# Altium PCB TIDA-01485.PcbDoc (part 1 of 2)
Units mil, origin at the board's own origin, x right, y up, seen from the top; angles counter-clockwise.
Board outline 1417.32 x 1968.5 mil, 4 copper layers (Top Layer, GND, PWR, Bottom Layer), stack 79.834 mil thick; 108 components, 78 nets, 395 pads, 443 vias.
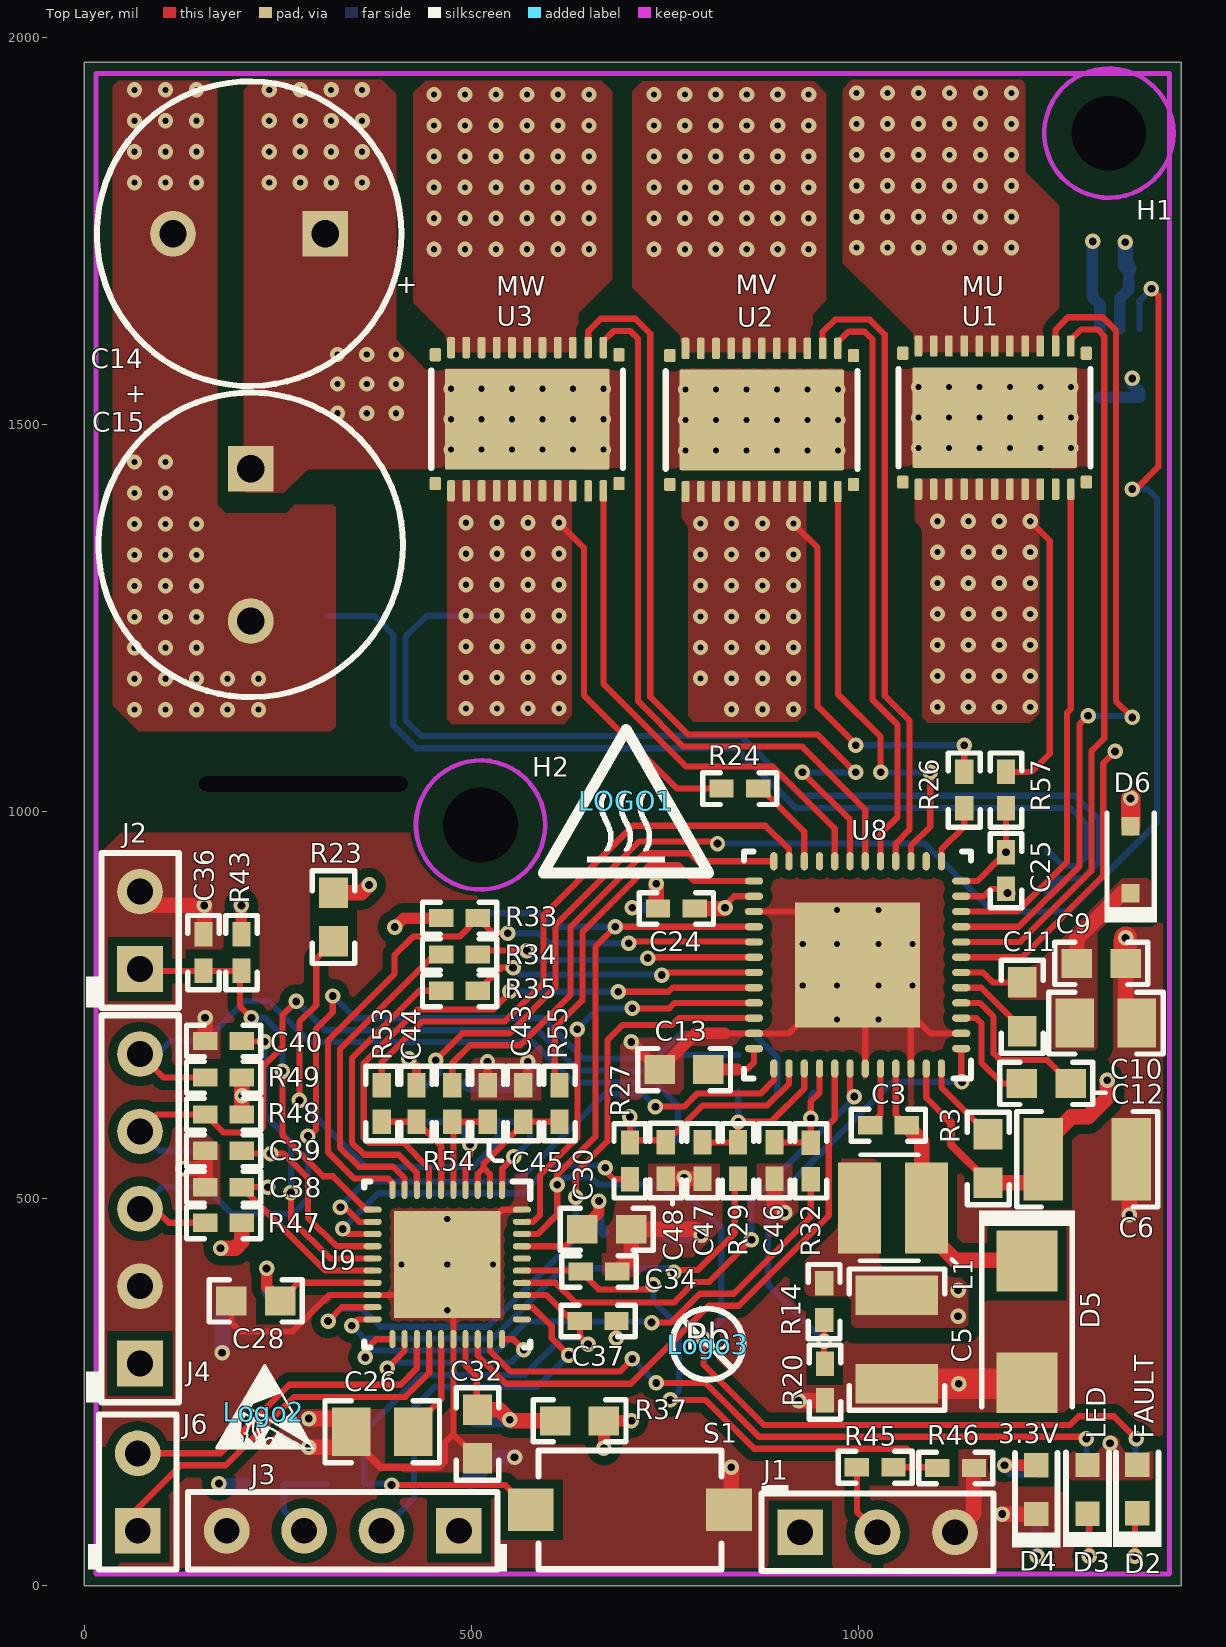
[diagram p0: Top Layer view]
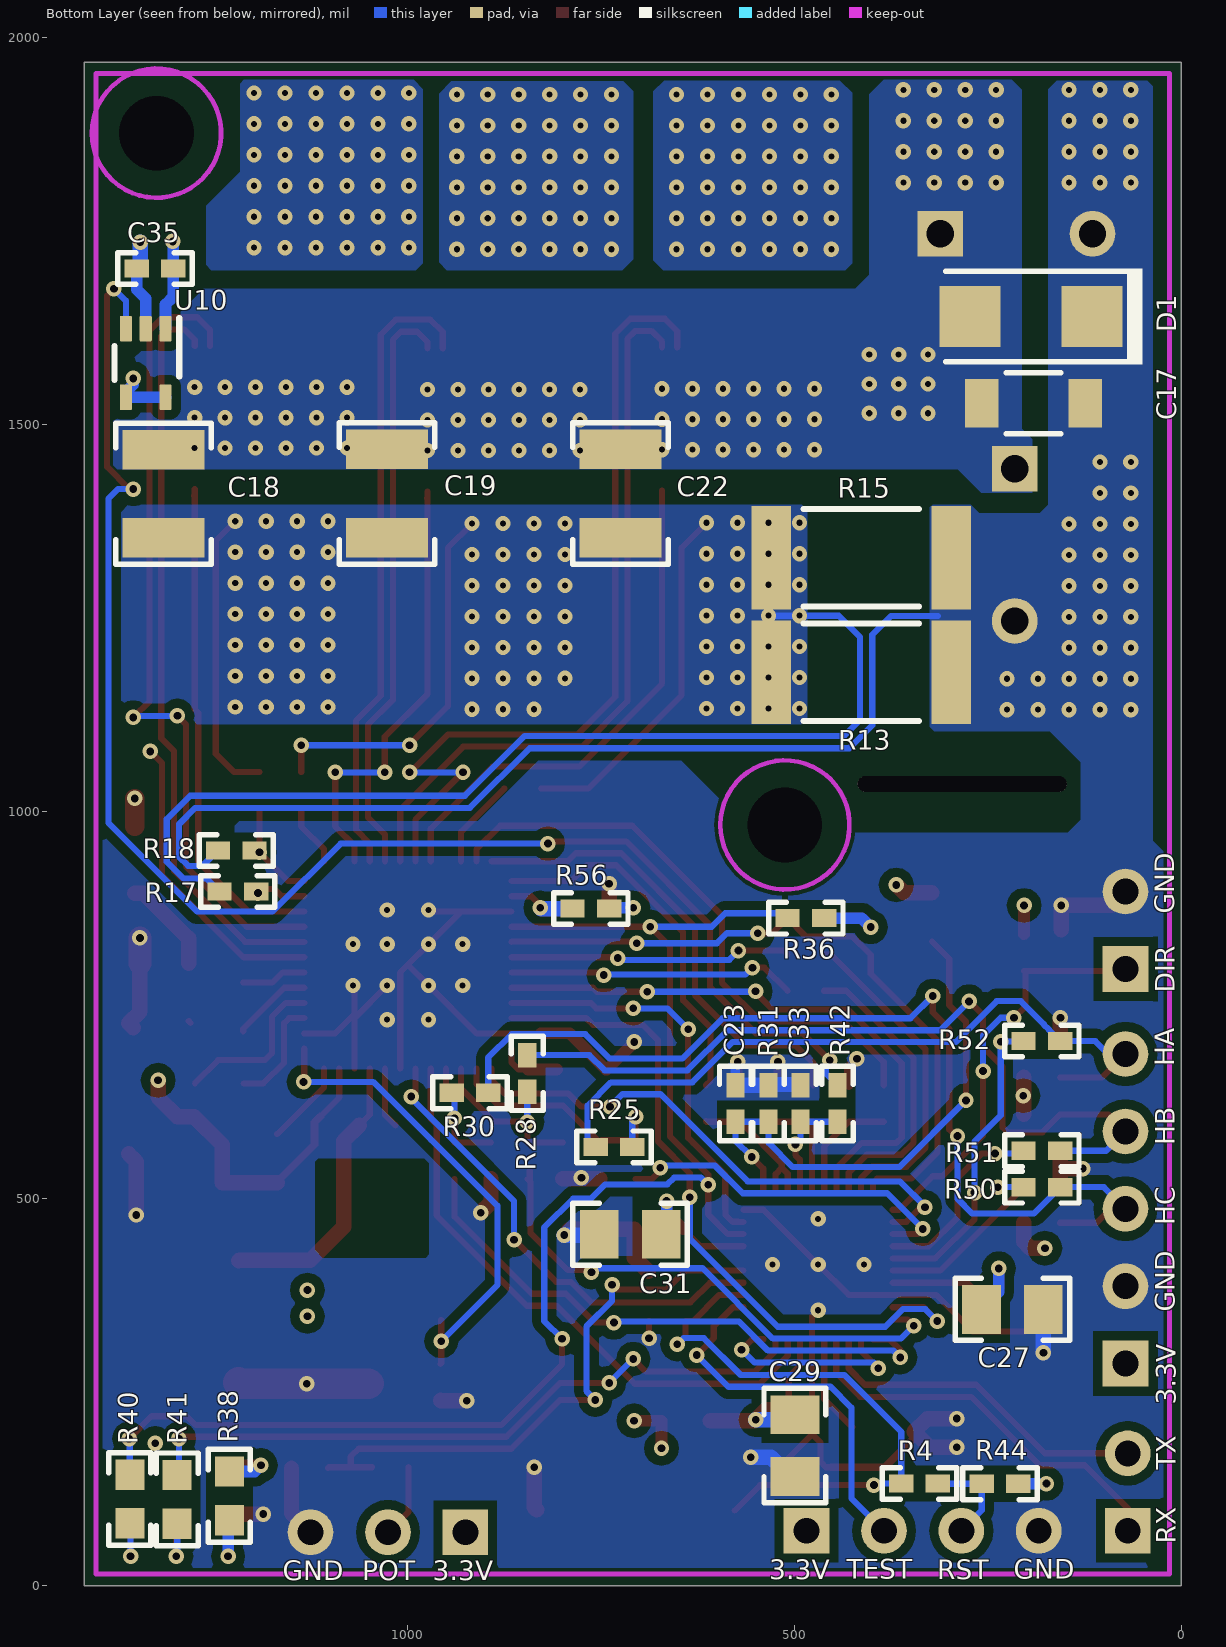
[diagram p1: Bottom Layer view, seen from below]
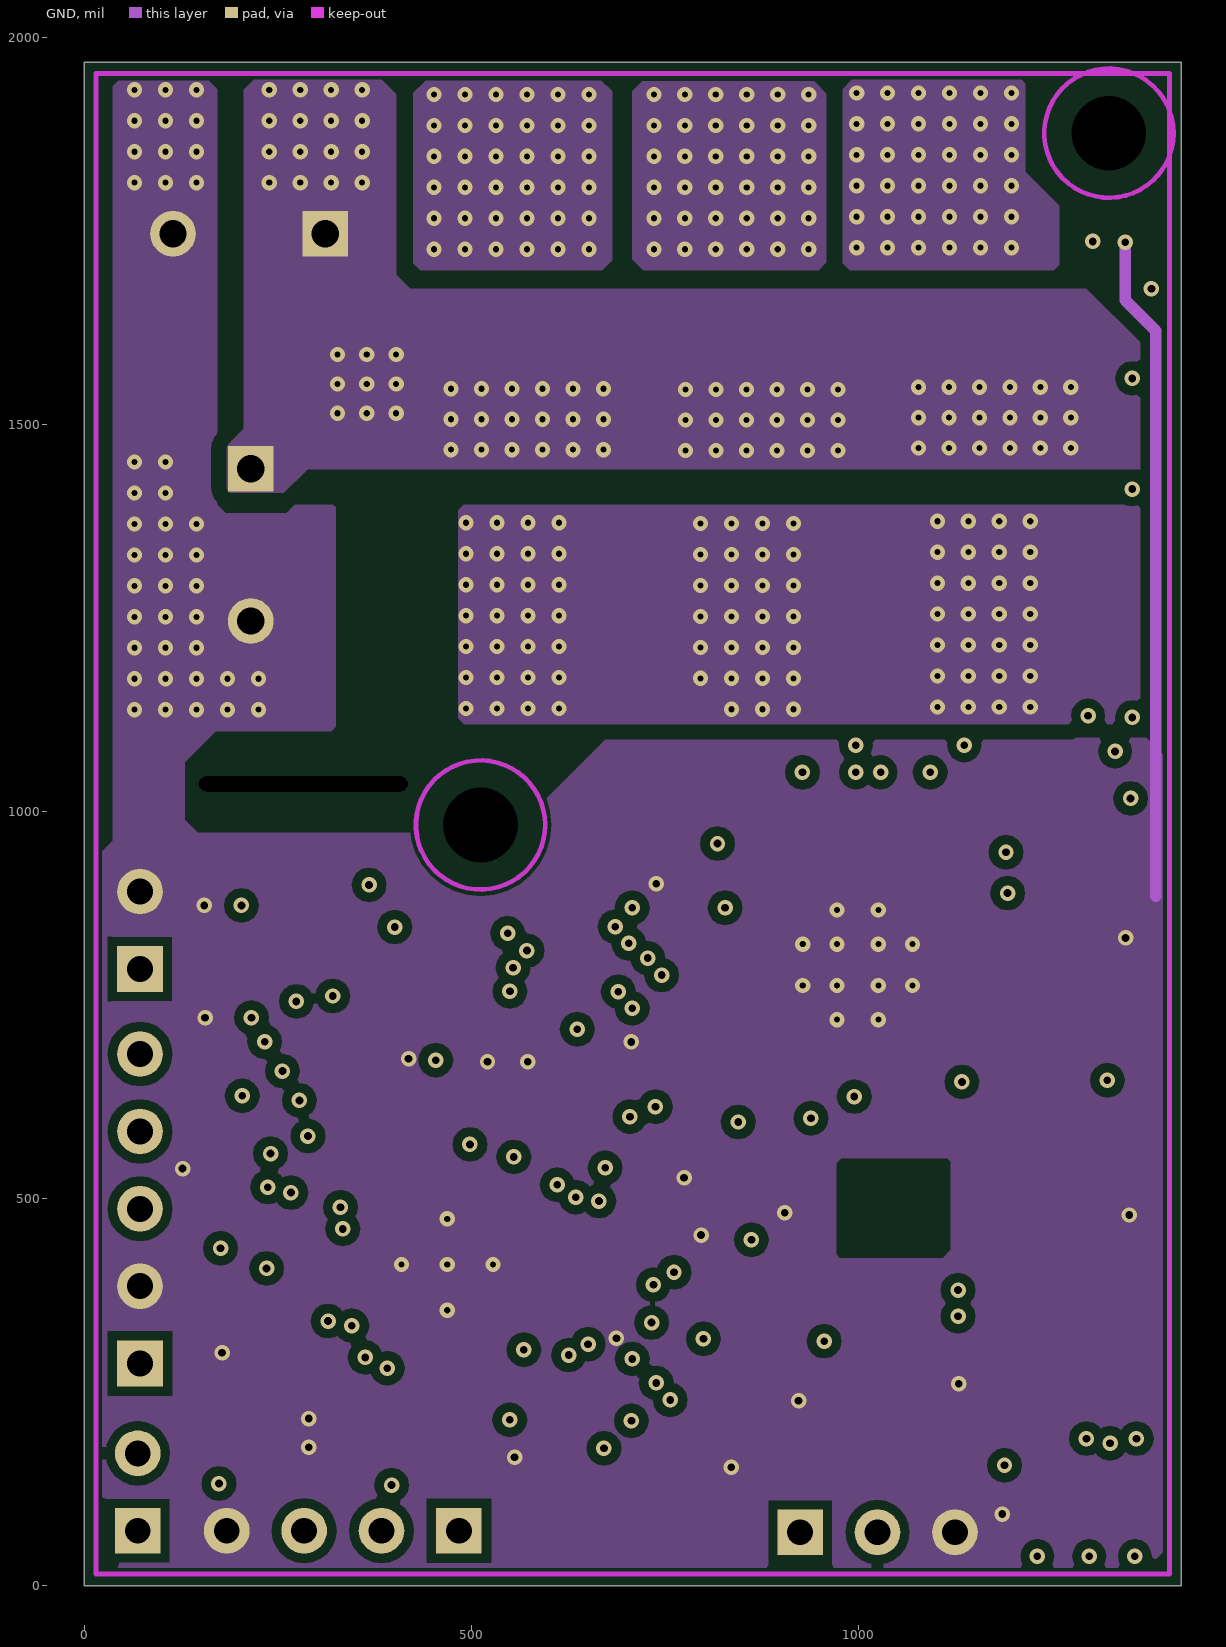
[diagram p2: GND]
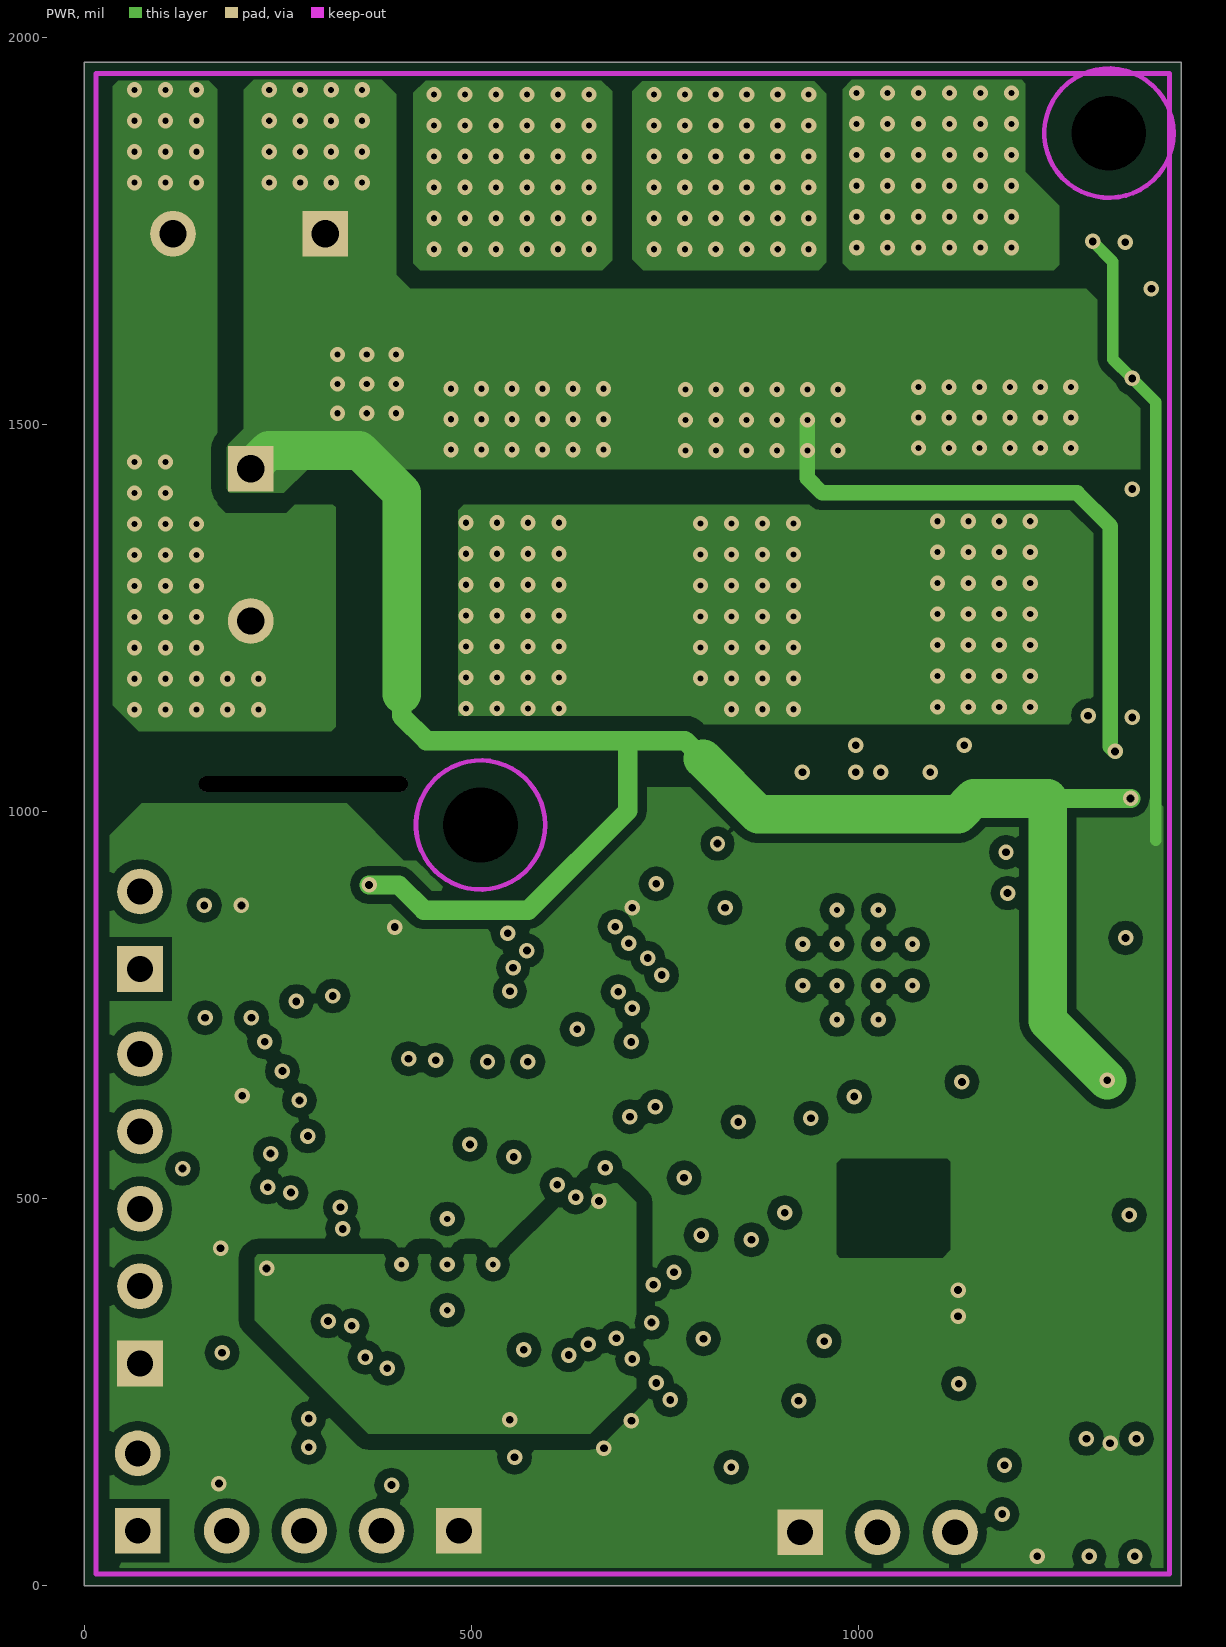
[diagram p3: PWR]

## Layer stack, top to bottom
Top Solder: solder mask 0.4, Solder Resist, Dk 3.5
Top Layer: signal copper 1.4
Dielectric1: core 59.2, FR-4, Dk 4.8
GND: signal copper 1.417
Dielectric 3: prepreg 5, Dk 4.2
PWR: signal copper 1.417
Dielectric 2: core 10, Dk 4.2
Bottom Layer: signal copper 1.4
Bottom Solder: solder mask 0.4, Solder Resist, Dk 3.5

## Board outline
0,0 1417.32,0 1417.32,1968.5 0,1968.5

## Design rules (kind name [scope] priority, off if disabled: settings)
AcuteAngle [All] p1: minimum=4.50000000000000E+0001 checktracksonly=FALSE
AssemblyTestPointUsage [All] p1: valid=2
Clearance Clearance_u1 [InPadClass('U1')] p1: gap=7.7
Clearance Clearance_Boardedge_poly [OnCopper and InPolygon vs IsKeepOut] p2: gap=5
Clearance Clearance_MTG_COPPER [InPadClass('MTG') vs InPolygon] p3: gap=40
Clearance "Shape to Shape" [InPolygon vs InPolygon] p4: gap=20
Clearance "shape to all" [InPolygon] p5: gap=12
Clearance "Clearance_via_thr pin" [IsVia vs IsThruPin] p6: gap=8
Clearance [All] p7: gap=7
DiffPairsRouting DiffPair_DiffPairsRouting [InDifferentialPair ('kan')] p1: maxlimit=10 minlimit=10 mostfreqgap=10 toplayer_minwidth=15 toplayer_maxwidth=15 toplayer_prefwidth=15 midlayer1_minwidth=15 midlayer1_maxwidth=15 midlayer1_prefwidth=15 midlayer2_minwidth=15 midlayer2_maxwidth=15 midlayer2_prefwidth=15 bottomlayer_minwidth=15 bottomlayer_maxwidth=15 bottomlayer_prefwidth=15 maxuncoupledlength=500
DiffPairsRouting DiffPair_DiffPairsRouting_1 [InDifferentialPair ('kan')] p2: maxlimit=10 minlimit=10 mostfreqgap=10 toplayer_minwidth=15 toplayer_maxwidth=15 toplayer_prefwidth=15 midlayer1_minwidth=15 midlayer1_maxwidth=15 midlayer1_prefwidth=15 midlayer2_minwidth=15 midlayer2_maxwidth=15 midlayer2_prefwidth=15 bottomlayer_minwidth=15 bottomlayer_maxwidth=15 bottomlayer_prefwidth=15 maxuncoupledlength=500
DiffPairsRouting [All] p3: maxlimit=100 minlimit=10 mostfreqgap=10 toplayer_minwidth=15 toplayer_maxwidth=15 toplayer_prefwidth=15 midlayer1_minwidth=15 midlayer1_maxwidth=15 midlayer1_prefwidth=15 midlayer2_minwidth=15 midlayer2_maxwidth=15 midlayer2_prefwidth=15 bottomlayer_minwidth=15 bottomlayer_maxwidth=15 bottomlayer_prefwidth=15 maxuncoupledlength=1000
FabricationTestPointUsage TestPointUsage [All] p1: valid=2 allowmultiple=FALSE
FabricationTestpoint Testpoint [All] p1: side=3 testpointundercomponent=TRUE minsize=40 maxsize=100 preferedsize=60 minholesize=0 maxholesize=40 preferedholesize=32 testpointgrid=1 allowsidetop=TRUE allowsidebottom=TRUE usegrid=TRUE gridtolerance=0.01
FanoutControl Fanout_LCC [IsLCC] p1: bgadir=Out bgaviamode=Centered fanoutstyle=Auto fanoutdirection=Alternating viagrid=1 // Fanout_LCC (Default Rule)
FanoutControl Fanout_BGA [IsBGA] p2: bgadir=Out bgaviamode=Centered fanoutstyle=Auto fanoutdirection=Alternating viagrid=1 // Fanout_BGA (Default Rule)
FanoutControl Fanout_Default [All] p4: bgadir=Out bgaviamode=Centered fanoutstyle=Auto fanoutdirection=Alternating viagrid=1 // Fanout_Default (Default Rule)
FanoutControl Fanout_Small [(CompPinCount < 5)] p5: bgadir=Out bgaviamode=Centered fanoutstyle=Auto fanoutdirection=OutThenIn viagrid=1 // Fanout_Small (Default Rule)
HoleSize [All] p1: absolutevalues=TRUE maxlimit=1000 minlimit=7 maxpercent=80.000 minpercent=20.000
MatchedLengths DiffPair_MatchedLengths [InDifferentialPair ('kan')] p1: tolerance=1000 checknetsindiffpair=TRUE checkdiffpairvsdiffpair=FALSE checkxsignals=FALSE checkothers=FALSE
MatchedLengths DiffPair_MatchedLengths_1 [InDifferentialPair ('kan')] p2: tolerance=1000 checknetsindiffpair=TRUE checkdiffpairvsdiffpair=FALSE checkxsignals=FALSE checkothers=FALSE
MinimumAnnularRing [All] p1: minimumring=5
MinimumAnnularRing MinimumAnnularRing_ThermalPadVias [IsVia and InAnyComponent] p2: minimumring=5.91
MinimumSolderMaskSliver MinimumSolderMaskSliver_Logo [InComponentClass('Logo') vs InComponentClass('Logo')] p1: minsoldermaskwidth=0.7
MinimumSolderMaskSliver [All] p2: minsoldermaskwidth=3.94
PlaneClearance [All] p1: clearance=15
PolygonConnect [All] p1: connectstyle=Direct reliefconductorwidth=10 reliefentries=4 polygonreliefangle="90 Angle" airgapwidth=10
RoutingVias RoutingVias_power [InNetClass('POWER')] p1: holewidth=16 width=32 viastyle="Through Hole" minholewidth=7.87 minwidth=19.68 maxholewidth=16 maxwidth=32
RoutingVias ThermalPadVias [IsVia and InAnyComponent] p2: holewidth=8 width=20 viastyle="Through Hole" minholewidth=7.87 minwidth=19 maxholewidth=12 maxwidth=24
RoutingVias [All] p3: holewidth=10 width=20 viastyle="Through Hole" minholewidth=7.87 minwidth=19.68 maxholewidth=16 maxwidth=32
SMDToCorner [All] p1: distance=30000
SilkToSilkClearance [All] p1: silktosilkclearance=5
SilkToSolderMaskClearance SilkscreenOverComponentPads [IsPad] p1: minsilkscreentomaskgap=0 clearancetoexposedcopper=TRUE
SolderMaskExpansion [All] p1: expansion=3
Width Width_power [InNetClass('pwr')] p1: maxlimit=200 minlimit=10 preferedwidth=20
Width [All] p2: maxlimit=100 minlimit=6 preferedwidth=8 checkconnectedcopper=TRUE
17 further rules are at their usual default settings.

## Classes and differential pairs
component class TIDA-01485_Page2: C26 C27 C28 C29 C30 C31 C32 C33 C34 C35 C36 C37 C38 C39 C40 C? D2 D3 D4 J1 J2 J3 J4 J6 R4 R37 R38 R40 R41 R42 R43 R44 R45 R46 R47 R48 R49 R50 R51 R52 R? S1 U9 U10
component class TIDA-01485_Page1: C3 C5 C6 C9 C10 C11 C12 C13 C14 C15 C17 C23 C24 C25 C43 C44 C45 C46 C47 C48 D1 D5 D6 L1 R3 R14 R20 R23 R24 R25 R26 R27 R28 R29 R30 R31 R32 R33 R34 R35 R36 R53 R54 R55 R56 R57 U8
component class AssemblyNote: ZZ1 ZZ2 ZZ3 ZZ4
component class TIDA-01485_Hardware: H1 H2 LOGO1 Logo2 Logo3 U? ZZ1 ZZ2 ZZ3 ZZ4
pad class U1: U9-39 U9-40 U9-41
component class TIDA-01485_Page3: C18 C19 C22 R13 R15 R17 R18 R? U1 U2 U3
component class Header: J1 J2 J4 J6

## Components (designator, comment, footprint, x,y, rotation, side; value= is the part's Value field where it differs from the comment)
C3 "GRM155R71E103KA01D" 0402 1039,595 r0 top
C5 "TMK325B7226KMHT" 1210_270 1050,318 r270 top
C6 "GRM32ER72A225KA35L" 1210 1296,551 r0 top
C9 "06035C104KAT2A" 0603 1314,804 r0 top
C10 "C2012X7R1V475K125AC" 0805_HV 1320,727 r180 top
C11 "C1608X7R1C105K" 0603 1212,748 r270 top
C12 "C0603C223K3RACTU" 0603 1243,649 r0 top
C13 "C1608X7R1C105K" 0603 775,667 r180 top
C14 "35ZLG470MEFC10X20" CAPPR5-10X20 213,1747 r180 top
C15 "35ZLG470MEFC10X20" CAPPR5-10X20 215,1345 r270 top
C17 "C3216X7R2A104K160AA" 1206_180 191,1528 r180 bottom
C18 "GRM32ER72A225KA35L" 1210 1315,1411 r270 bottom
C19 "GRM32ER72A225KA35L" 1210 1026.32,1411.33 r270 bottom
C22 "GRM32ER72A225KA35L" 1210_270 724.32,1411.33 r270 bottom
C23 "885012105016" 0402 576,623 r90 bottom
C24 "885012105016" 0402 765,875 r180 top
C25 "885012205061" 0402 1191,924 r90 top
C26 "C0805C474K4RACTU" 0805_HV 385,199 r180 top
C27 "0805YD106MAT2A" 0805_HV 218,357 r180 bottom
C28 "0603YC104JAT2A" 0603 221.5,368 r180 top
C29 "0805YD106MAT2A" 0805_HV 499,181 r270 bottom
C30 "0603YC104JAT2A" 0603 675,460.57 r0 top
C31 "0805YD106MAT2A" 0805_HV 712,454 r0 bottom
C32 "0603YC104JAT2A" 0603 508,196 r270 top
C33 "885012105016" 0402 492,623 r90 bottom
C34 "885012105016" 0402 665,406 r0 top
C35 "885012105016" 0402 1326,1702 r0 bottom
C36 "885012105016" 0402 154,818 r90 top
C37 "GRM155R71H222KA01D" 0402 664,342 r0 top
C38 "885012205061" 0402 180,515 r180 top
C39 "885012205061" 0402 180,562 r180 top
C40 "885012205061" 0402 180,703.81 r180 top
C43 "CGA2B2X7R1H332K050BA" 0402 567.35,623 r90 top
C44 "CGA2B2X7R1H332K050BA" 0402 429.35,623 r90 top
C45 "CGA2B2X7R1H332K050BA" 0402 521.35,623 r90 top
C46 "885012205061" 0402 891.81,549.22 r270 top
C47 "885012205061" 0402 798.81,549.22 r270 top
C48 "885012205061" 0402 751.37,549.44 r270 top
D1 "SMAJ58CA" SMA 194,1640 r0 bottom
D2 "150060GS75000" WL-SMCW_GREEN 1360.54,125 r90 top
D3 "150060GS75000" WL-SMCW_GREEN 1296.3,124.5 r90 top
D4 "150060GS75000" WL-SMCW_GREEN 1229.98,124.06 r90 top
D5 "ES2DA-13-F" SMA 1218,341 r270 top
D6 "PMEG6010CEJ,115" SOD-323F 1352,938 r90 top
H1 "NY PMS 256 0025 PH" "NY PMS 256 0025 PH" 1324,1877 r180 top locked
H2 "NY PMS 256 0025 PH" "NY PMS 256 0025 PH" 512,983 r180 top locked
J1 "800-10-003-10-001000" Mill-Max_800-10-003-10-001000 1025,69 r0 top
J2 "800-10-002-10-001000" Mill-Max_800-10-002-10-001000 72,846.91 r90 top
J3 "HEADER_1X4" Mill-Max_800-10-004-10-001000 334,71 r180 top
J4 "800-10-005-10-001000" Mill-Max_800-10-005-10-001000 72,487 r90 top
J6 "800-10-002-10-001000" Mill-Max_800-10-002-10-001000 69,121 r90 top
L1 "SDR0302-121KL" SDR0302 1045,488 r180 top
LOGO1 "CAUTION HOT SURFACE" IEC_HotSurface_small 700,1014 r0 top
Logo2 "ESD Susceptible" ESD_Overlay_small 232,225 r0 top
Logo3 "Pb-Free Symbol" Pb-Free_Overlay_small 805.72,312.01 r0 top
R3 "CRCW06033R30JNEA" 0603 1168,552 r270 top
R4 "ERJ-2RKF1000X" 0402 338,132 r180 bottom
R13 "CSNL2512FT2L00" 2512 413.32,1180.33 r180 bottom
R14 "CRCW040230K9FKED" 0402 956,367 r90 top
R15 "CSNL2512FT2L00" 2512 413.32,1328.33 r180 bottom
R17 "ERJ-2RKF1000X" 0402 1219,897 r0 bottom
R18 "ERJ-2RKF1000X" 0402 1221,950 r0 bottom
R20 "CRCW040210K0FKED" 0402 957,263 r90 top
R23 "RC0603FR-0734K8L" 0603 322,864 r90 top
R24 "CRCW04020000Z0ED" 0402 847,1030 r0 top
R25 "ERJ-2RKF1000X" 0402 733,567 r180 bottom
R26 "CRCW04020000Z0ED" 0402 1137,1028 r270 top
R27 "ERJ-2RKF1000X" 0402 705,549 r90 top
R28 "ERJ-2RKF1000X" 0402 845,662 r270 bottom
R29 "ERJ-2RKF1000X" 0402 844.81,549.22 r90 top
R30 "ERJ-2RKF1000X" 0402 919,637 r0 bottom
R31 "ERJ-2RKF2201X" 0402 533.16,623 r270 bottom
R32 "ERJ-2RKF1000X" 0402 938.79,548.97 r90 top
R33 "CRCW040210K0FKED" 0402 485,862.65 r0 top
R34 "ERJ-2RKF1000X" 0402 485,815.65 r180 top
R35 "ERJ-2RKF1000X" 0402 485,768.65 r180 top
R36 "CRCW040210K0FKED" 0402 485,862.65 r0 bottom
R37 "CRCW06033R30JNEA" 0603 640,213 r180 top
R38 "CRCW06031K00JNEA" 0603 1229.98,116.06 r270 bottom
R40 "CRCW06031K00JNEA" 0603 1358.54,112 r270 bottom
R41 "CRCW06031K00JNEA" 0603 1297.3,111.5 r270 bottom
R42 "CRCW040210K0FKED" 0402 444,623 r90 bottom
R43 "ERJ-2RKF1004X" 0402 203.19,818 r270 top
R44 "CRCW040247K5FKED" 0402 234,131.76 r180 bottom
R45 "CRCW040210K0FKED" 0402 1022,153 r180 top
R46 "ERJ-2RKF1004X" 0402 1126,152 r180 top
R47 "CRCW04023K30JNED" 0402 180,469 r0 top
R48 "CRCW04023K30JNED" 0402 180,609 r0 top
R49 "CRCW04023K30JNED" 0402 180,656.81 r0 top
R50 "ERJ-2RKF1000X" 0402 180,515 r180 bottom
R51 "ERJ-2RKF1000X" 0402 180,562 r180 bottom
R52 "ERJ-2RKF1000X" 0402 180,703.81 r180 bottom
R53 "ERJ-2RKF1000X" 0402 384.35,623 r270 top
R54 "ERJ-2RKF1000X" 0402 475.35,623 r270 top
R55 "ERJ-2RKF1000X" 0402 614,623 r270 top
R56 "CRCW04020000Z0ED" 0402 762.81,875 r0 bottom
R57 "CRCW04020000Z0ED" 0402 1191,1028 r270 top
S1 "434121025816" SW_434121025816 705,98 r180 top
U1 "CSD88599Q5DC" DMM0022A 1176.32,1509.33 r270 top
U2 "CSD88599Q5DC" DMM0022A 875.32,1506.33 r270 top
U3 "CSD88599Q5DC" DMM0022A 572.32,1507.33 r270 top
U8 "DRV8323RSRGZR" RGZ0048B 999.29,802.29 r180 top
U9 "MSP430F5132IRSBR" RSB0040B 469,415 r270 top
U10 "LMT87QDCKRQ1" DCK0005A_N 1338,1580 r270 bottom
ZZ1 "This Assembly Note is for PCB labels only" AssemblyNoteLabel -645,3011 r0 top
ZZ2 "These assemblies are ESD sensitive, ESD precautions shall be observed." AssemblyNote -651.15,2948.85 r0 top
ZZ3 "These assemblies must be clean and free from flux and all contaminants. Use of no clean flux is not acceptable." AssemblyNote -651.15,2873.85 r0 top
ZZ4 "These assemblies must comply with workmanship standards IPC-A-610 Class 2, unless otherwise specified." AssemblyNote -649.15,2802.85 r90 top

## Footprints (in the part's own frame and the unit in brackets; to place one, negate y for a bottom-side part, rotate by r counter-clockwise, add the part's x,y. Pads: shape width x height; smd on the part's side, far side on the other; paste and mask are expansions set on the pad)
0402 [mm] "0402 from SM-752 data"
  rect 0.8x0.6 smd: 1(-0.6,0) 2(0.6,0)
  silkscreen extent -1.22,-0.52 1.22,0.52, body extent -0.55,-0.3 0.55,0.3, height 0.6
0603 [mm] "0603 from SM-752 data"
  rect 1x0.95 smd: 1(-0.8,0) 2(0.8,0)
  silkscreen extent -1.52,-0.69 1.52,0.69, body extent -0.87,-0.47 0.87,0.47, height 1
0805_HV [mil] "0805 with 30mil clearance between pads"
  rect 50x63 smd: 1(-40,0) 2(40,0)
  silkscreen extent -74,-40 74,40, body extent -43,-29 43,29, height 57
1206_180 [mm] "1206_180"
  rect 1.1x1.6 smd: 1(-1.7,0) 2(1.7,0)
  silkscreen extent -0.9,-1 0.9,1, body extent -1.75,-0.95 1.75,0.95, height 1.8
1210 [mm] "1210 from SM-752 data"
  rect 1.3x2.7 smd: 1(-1.45,0) 2(1.45,0)
  silkscreen extent -2.32,-1.57 2.32,1.57, body extent -1.7,-1.35 1.7,1.35, height 1.35
1210_270 [mm] "1210"
  rect 1.3x2.7 smd: 1(-1.45,0) 2(1.45,0)
  silkscreen extent -2.32,-1.57 2.32,1.57, body extent -1.7,-1.35 1.7,1.35, height 2.7
2512 [mm] "Chip Resistor, Body 6.3x3.2mm, IPC Medium Density"
  rect 1.3x3.4 smd: 1(-2.95,0) 2(2.95,0)
  silkscreen extent -1.9,-1.6 1.9,1.6, body extent -3.22,-1.67 3.22,1.67, height 0.71
AssemblyNote [mil] "Assembly Note"
AssemblyNoteLabel [mil] "Assembly Note for PCB Labels"
CAPPR5-10X20 [mm] "Capacitor, Electrolytic, Radial; Body 10 x 20 mm (Dia.xH typ); Pin Spacing 5 mm (typ)"
  rect 1.5x1.5 hole 0.9: 1(-2.5,0)
  round 1.5 hole 0.9: 2(2.5,0)
  silkscreen extent -5,-5 5,5, body extent -5,-5 5,5, height 22
DCK0005A_N [mm] "SOT353, 5-Leads, Body 2x1.3mm, Pitch 0.65mm, Lead Span 2.1mm, IPC Medium Density"
  rrect25% 0.85x0.4 smd: 1(-1.125,0.65) 2(-1.125,0) 3(-1.125,-0.65) 4(1.125,-0.65) 5(1.125,0.65)
  silkscreen extent -1.48,-1.02 0.55,1.1, body extent -1.14,-1 1.14,1, height 0.95
DMM0022A [mm] "SON, 27-Leads, Body 5x6mm, Pitch 0.5mm"
  rrect40% 0.7x0.25 smd: 1(-2.35,2.5) 2(-2.35,2) 21(2.35,2) 22(2.35,2.5)
  rrect40% 0.7x0.25 smd mask+0: 3(-2.35,1.5) 4(-2.35,1) 5(-2.35,0.5) 6(-2.35,0) 7(-2.35,-0.5) 8(-2.35,-1) 9(-2.35,-1.5) 10(-2.35,-2) 11(-2.35,-2.5) 12(2.35,-2.5) 13(2.35,-2) 14(2.35,-1.5) 15(2.35,-1) 16(2.35,-0.5) 17(2.35,0) 18(2.35,0.5) 19(2.35,1) 20(2.35,1.5)
  rrect27% 0.43x0.375 smd: 23(-2.115,3.013) 24(-2.115,-3.013) 25(2.115,-3.013) 26(2.115,3.013)
  rrect3% 3.3x5.4 smd paste-1.65: 27(0,0)
  rrect50% 1.41x1.12 on Top Paste: ""(-0.805,1.98) ""(-0.805,0.66) ""(-0.805,-0.66) ""(-0.805,-1.98) ""(0.805,1.98) ""(0.805,0.66) ""(0.805,-0.66) ""(0.805,-1.98)
  silkscreen extent -1.6,-3.15 1.6,3.15, body extent -2.55,-3.05 2.55,3.05, height 1.05
ESD_Overlay_small [mil]
  silkscreen extent -62,-48 64,61
IEC_HotSurface_small [mil]
  silkscreen extent -107,-93 107,92
Mill-Max_800-10-002-10-001000 [mm] "Mill-Max"
  rect 1.5x1.5 hole 0.85: 1(-1.27,0)
  round 1.5 hole 0.85: 2(1.27,0)
  silkscreen extent -2.54,-1.27 2.54,1.78, body extent -2.54,-1.27 2.54,1.27, height 8.13
Mill-Max_800-10-003-10-001000 [mm] "Mill-Max"
  rect 1.5x1.5 hole 0.85: 1(-2.54,0)
  round 1.5 hole 0.85: 2(0,0) 3(2.54,0)
  silkscreen extent -3.81,-1.27 3.81,1.55, body extent -3.81,-1.27 3.81,1.27, height 8.13
Mill-Max_800-10-004-10-001000 [mm] "Mill-Max"
  rect 1.5x1.5 hole 0.85: 1(-3.81,0)
  round 1.5 hole 0.85: 2(-1.27,0) 3(1.27,0) 4(3.81,0)
  silkscreen extent -5.38,-1.27 5.08,1.35, body extent -5.08,-1.27 5.08,1.27, height 8.13
Mill-Max_800-10-005-10-001000 [mm] "Mill-Max"
  rect 1.5x1.5 hole 0.85: 1(-5.08,0)
  round 1.5 hole 0.85: 2(-2.54,0) 3(0,0) 4(2.54,0) 5(5.08,0)
  silkscreen extent -6.35,-1.27 6.35,1.78, body extent -6.35,-1.27 6.35,1.27, height 8.13
"NY PMS 256 0025 PH" [mm] "Machine Screw Pan Phillips 2-56"
  round 2 hole 2.45 unplated mask+0.381: ""(0,0)
  body extent -2.12,-2.12 2.12,2.12, height 1.45
Pb-Free_Overlay_small [mil]
  silkscreen extent -46,-46 46,46
RGZ0048B [mm] "QFN, 48-Leads, Body 7x7mm, Pitch 0.5mm, Thermal Pad 5.15x5.15mm, TI Recommended"
  oval 0.6x0.24 smd: 1(-3.4,2.75) 2(-3.4,2.25) 3(-3.4,1.75) 4(-3.4,1.25) 5(-3.4,0.75) 6(-3.4,0.25) 7(-3.4,-0.25) 8(-3.4,-0.75) 9(-3.4,-1.25) 10(-3.4,-1.75) 11(-3.4,-2.25) 12(-3.4,-2.75) 25(3.4,-2.75) 26(3.4,-2.25) 27(3.4,-1.75) 28(3.4,-1.25) 29(3.4,-0.75) 30(3.4,-0.25) 31(3.4,0.25) 32(3.4,0.75) 33(3.4,1.25) 34(3.4,1.75) 35(3.4,2.25) 36(3.4,2.75)
  oval 0.24x0.6 smd: 13(-2.75,-3.4) 14(-2.25,-3.4) 15(-1.75,-3.4) 16(-1.25,-3.4) 17(-0.75,-3.4) 18(-0.25,-3.4) 19(0.25,-3.4) 20(0.75,-3.4) 21(1.25,-3.4) 22(1.75,-3.4) 23(2.25,-3.4) 24(2.75,-3.4) 37(2.75,3.4) 38(2.25,3.4) 39(1.75,3.4) 40(1.25,3.4) 41(0.75,3.4) 42(0.25,3.4) 43(-0.25,3.4) 44(-0.75,3.4) 45(-1.25,3.4) 46(-1.75,3.4) 47(-2.25,3.4) 48(-2.75,3.4)
  rect 4.1x4.1 smd paste-2.575: 49(0,0)
  silkscreen extent -3.72,-3.72 3.72,3.72, body extent -3.57,-3.58 3.58,3.57, height 1.01
RSB0040B [mm] "QFN, 40-Leads, Body 5x5mm, Pitch 0.4mm, Thermal Pad 3.5x3.5mm, TI Recommended"
  oval 0.6x0.2 smd: 1(-2.45,1.8) 2(-2.45,1.4) 3(-2.45,1) 4(-2.45,0.6) 5(-2.45,0.2) 6(-2.45,-0.2) 7(-2.45,-0.6) 8(-2.45,-1) 9(-2.45,-1.4) 10(-2.45,-1.8) 21(2.45,-1.8) 22(2.45,-1.4) 23(2.45,-1) 24(2.45,-0.6) 25(2.45,-0.2) 26(2.45,0.2) 27(2.45,0.6) 28(2.45,1) 29(2.45,1.4) 30(2.45,1.8)
  oval 0.2x0.6 smd: 11(-1.8,-2.45) 12(-1.4,-2.45) 13(-1,-2.45) 14(-0.6,-2.45) 15(-0.2,-2.45) 16(0.2,-2.45) 17(0.6,-2.45) 18(1,-2.45) 19(1.4,-2.45) 20(1.8,-2.45) 31(1.8,2.45) 32(1.4,2.45) 33(1,2.45) 34(0.6,2.45) 35(0.2,2.45) 36(-0.2,2.45) 37(-0.6,2.45) 38(-1,2.45) 39(-1.4,2.45) 40(-1.8,2.45)
  rect 3.5x3.5 smd paste-1.75: 41(0,0)
  silkscreen extent -2.72,-2.73 2.72,2.73, body extent -2.57,-2.57 2.58,2.58, height 0.81
SDR0302 [mm] "BOURNS"
  rect 1.4x3 smd: 1(-1.1,0) 2(1.1,0)
  body extent -1.65,-1.65 1.65,1.65, height 2.8
SMA [mm] "Molded Diode, 2-Leads, Body 4.3x2.6mm, IPC Medium Density, based on OnSemi component dimensions and land pattern"
  rect 2x2 smd: 1(-2,0) 2(2,0)
  silkscreen extent -3.66,-1.57 2.79,1.57, body extent -2.6,-1.3 2.6,1.3, height 2.42
SOD-323F [mm] "NXP recommended land pattern"
  rect 0.6x0.6 smd paste-0.05: 1(-1.1,0) 2(1.1,0)
  silkscreen extent -2.06,-0.86 1.53,0.86, body extent -1.35,-0.67 1.35,0.68, height 0.79
SW_434121025816 [mm] "SMD, 2-Leads, Body 6x3.9mm, Pitch 6.5mm"
  rect 1.5x1.4 smd: 1(-3.25,0) 2(3.25,0)
  silkscreen extent -3,-1.95 3,1.95, body extent -3.65,-1.95 3.65,1.95, height 2.5
WL-SMCW_GREEN [mm] "WURTH"
  rect 0.8x0.8 smd: 1(-0.8,0) 2(0.8,0)
  silkscreen extent -1.9,-0.8 1.2,0.8, body extent -0.85,-0.45 0.85,0.45, height 0.8

## Part data
C3: library part 885012105016, "CAP, CERM, 0.1 µF, 16 V, +/- 20%, X5R, 0402"
C5: "CAP, CERM, 22 µF, 25 V, +/- 10%, X7R, AEC-Q200 Grade 1, 1210"
C6: "CAP, CERM, 2.2uF, 100V, +/-10%, X7R, 1210"
C9: "CAP, CERM, 0.1 µF, 50 V, +/- 10%, X7R, 0603"
C10: "CAP, CERM, 4.7 µF, 35 V, +/- 10%, X7R, 0805"
C11 C13: "CAP, CERM, 1 µF, 16 V, +/- 10%, X7R, 0603"
C12: "CAP, CERM, 0.022 µF, 25 V, +/- 10%, X7R, 0603"
C14 C15: library part 35ZL470MEFC10X20, "470µF 35V CAP ALUM CAN 4000 Hrs @ 105°C"
C17: "CAP, CERM, 0.1 µF, 100 V, +/- 10%, X7R, 1206"
C18 C19 C22: "CAP, CERM, 2.2 µF, 100 V, +/- 10%, X7R, 1210"
C23 C24 C33 C34 C35 C36: "CAP, CERM, 0.1 µF, 16 V, +/- 20%, X5R, 0402"
C25 C38 C39 C40 C46 C47 C48: "CAP, CERM, 1000 pF, 50 V, +/- 10%, X7R, 0402"
C26: "CAP, CERM, 0.47 µF, 16 V, +/- 10%, X7R, 0805"
C27 C29 C31: "CAP, CERM, 10uF, 16V, +/-20%, X5R, 0805"
C28 C30 C32: "CAP, CERM, 0.1 µF, 16 V, +/- 5%, X7R, 0603"
C37: "CAP, CERM, 2200 pF, 50 V, +/- 10%, X7R, 0402"
C43 C44 C45: "CAP, CERM, 3300 pF, 50 V, +/- 10%, X7R, AEC-Q200 Grade 1, 0402"
D1: "Diode, TVS, Bi, 58 V, SMA"
D2: "LED RED CLEAR 0603 SMD"
D3: "LED YELLOW CLEAR 0603 SMD"
D4: "LED, Green, SMD"
D5: "Diode, Superfast Rectifier, 200 V, 2 A, SMA"
D6: "Diode, Schottky, 60 V, 1 A, SOD-323F"
H1 H2: "MACHINE SCREW PAN PHILLIPS 2-56"
J1: "Header, 100mil, 3x1, TH"
J2 J6: "Header, 100mil, 2x1, TH"
J3: "Header, Male 4-pin, 100mil spacing,"
J4: "Header, 100mil, 5x1, TH"
L1: "Inductor, Drum Core, Ferrite, 120uH, 0.22A, 3.2 ohm, SMD"
LOGO1: library part IEC_HotSurface, "IEC 61010-1 Hot Surface Warning"
Logo2: library part ESD_Susceptible, "ESD Susceptible Symbol"
Logo3: library part Pb-Free
R3: library part CRCW0402100KFKED, "RES, 100 k, 1%, 0.063 W, 0402"
R4 R17 R18 R25 R27 R28 R29 R30 R32 R34 R35 R50 R51 R52 R53 R54 R55: "RES, 100, 1%, 0.1 W, 0402"
R13 R15: "RES SMD 0.001 OHM 1% 5W 2512"
R14: library part CRCW040228K0FKED, "RES, 28.0 k, 1%, 0.063 W, 0402"
R20: library part CRCW04028K45FKED, "RES, 8.45 k, 1%, 0.063 W, 0402"
R23: "RES SMD 2M OHM 1% 1/10W 0603"
R24 R26 R56 R57: "RES, 0, 5%, 0.063 W, 0402"
R31: library part CRCW0402150KFKED, "RES, 150 k, 1%, 0.063 W, 0402"
R33 R36 R42 R45: "RES, 10.0 k, 1%, 0.063 W, 0402"
R37: "RES, 3.3, 5%, 0.1 W, 0603"
R38 R40 R41: "RES, 1.0 k, 5%, 0.1 W, 0603"
R43 R46: "RES, 1.00 M, 1%, 0.1 W, 0402"
R44: "RES, 47.5 k, 1%, 0.063 W, 0402"
R47 R48 R49: "RES, 3.3 k, 5%, 0.063 W, 0402"
S1: "Switch, Tactile, SPST, 12 V, SMD"
U1 U2 U3: "60 V Half-Bridge NexFE Power Block, DMM0022A"
U8: "60-V Three-Phase Smart Gate Driver, RGZ0048B"
U9: "25 MHz Mixed Signal Microcontroller with 8 KB Flash, 1024 B SRAM and 29 GPIOs, -40 to 85 degC, 40-pin QFN (RSB), Green (RoHS & no Sb/Br)"
U10: "SC70 Analog Temperature Sensor with Class-AB Output, DCK0005A"
ZZ1: library part AssemblyNoteLabel
ZZ2 ZZ3 ZZ4: library part AssemblyNote

## Free pads (board coordinates)
  oval 270x20 hole 20 slot 270 at 0 deg unplated mask+5: 5(283,1036)

## Via types
v1: diameter 19.68, hole 7.87, Top Layer to Bottom Layer, 328 vias
v2: diameter 20, hole 10, Top Layer to Bottom Layer, tented both sides, 115 vias

## Nets (pads, with @x,y where several pads share a name; then routed paths per layer and width w, separated by ;. In a path a pad name is that pad's centre, name@x,y a point inside that pad or via, vN(x,y) a via of type N, cw(c..) or ccw(c..) an arc to the next point about the centre after c; other vN are vias at no path point)
3.3V: C5.1 C35.1 D2.2 D3.2 J1.1 J3.1 J4.1 L1.2 R14.2 R33.1 R36.1 R37.1 R38.2 R43.1 R44.2 R47.2 R48.2 R49.2 R56.1 U10.1 U10.4 U10.5 | length 1464.6
  Top Layer w15: v2(203,879) 203,841.81 R43.1@203.19,841.62 ; v2(401,851) 412.65,862.65 R33.1@461.38,862.65 ; v2(671.5,177.5) R37.1@671.5,213 v2(707,213)
  Top Layer w20: v2(176,436) 195,436 203.62,444.62 R47.2@203.62,469 ; R48.2@203.62,609 R49.2@203.62,656.81
  PWR w15: v2(1303,1737) 1329.1,1710.9 1329.1,1584.9 v2(1354,1560) 1384.42,1529.58 1384.42,963
  Bottom Layer w15: v2(174,132) 174.24,131.76 R44.2@210.38,131.76 ; v2(401,851) 412.65,862.65 R36.1@461.38,862.65 ; v2(708,876) 738.19,876 R56.1@739.19,875 ; R38.2@1229.98,84.56 1231.54,83 v2(1231.54,38) ; v2(1303,1737) 1303,1737.76 1302.38,1738.38 C35.1@1302.38,1702 1302.38,1665.62 1312.41,1655.59 U10.1@1312.41,1624.29 ; U10.5@1312.41,1535.71 U10.4@1363.59,1535.71 1363.59,1542.59 1354,1552.18 v2(1354,1560)
  other v2: 1325.54,184 1129,348 1129,382 204,633
CAL: U8.34 U9.19 | length 922.5
  Top Layer w8: v2(315,342) 332.88,359.88 U9.19@372.54,359.88 ; v2(635.03,502) 635.03,533.03 676,574 676,705 695.6,724.6 759.6,724.6 768.39,733.39 U8.34@865.43,733.39
  Bottom Layer w8: v2(315,342) 330.4,357.4 359.6,357.4 382.3,334.7 521.14,334.7 635.03,448.59 v2(635.03,502)
DC_FB: C23.1 R23.1 R31.2 U9.1 | length 700.6
  Top Layer w8: v2(278,627) 278,728.74 299.6,750.34 299.6,810.1 R23.1@322,832.5 ; U9.1@539.87,511.46 540,511.32 540,539 v2(555,554)
  Bottom Layer w8: v2(278,627) 364,541 502,541 533.16,572.16 R31.2@533.16,599.38 C23.1@576,599.38 576,575 v2(555,554)
DIR: C36.1 J2.1 R43.2 U9.11 | length 534.8
  Top Layer w8: J2.1@72,796.91 74.53,794.38 C36.1@154,794.38 R43.2@203.19,794.38 201,792.19 201,749 v2(216,734) ; v2(256,665) 256,581.78 308.78,529 321.26,529 364.4,485.87 U9.11@372.54,485.87
  Bottom Layer w8: v2(216,734) 233,734 256,711 v2(256,665)
DVDD: C13.1 U8.36 | length 80.4
  Top Layer w8: 844,667 856,667 865.43,676.43 U8.36@865.43,694.02
  Top Layer w15: C13.1@806.5,667 844,667
EN_GATE: U8.33 U9.39 | length 529.6
  Top Layer w8: U9.39@565.46,470.12 572.39,470.12 572.5,470.23 579.81,470.23 588.97,479.39 588.97,486.69 ; 589,486.72 589,530.78 630.45,572.23 630.53,572.23 637.21,578.91 637.21,718.79 v2(637,719) ; v2(708,746) 755.85,746 762.93,753.07 U8.33@865.43,753.07
  Bottom Layer w8: v2(637,719) 664,746 v2(708,746)
FAULT: R36.2 R40.1 U8.28 U9.38 | length 1910.3
  Top Layer w8: U9.38@565.46,454.37 585.73,454.37 611,479.64 v2(611,518) 611,531 636.83,556.83 636.91,556.83 652.61,572.53 652.61,572.61 660.6,580.6 660.6,826.1 v2(686,851.5) U8.28@865.43,851.5 ; v2(800,319) 800,286 878.2,207.8 1273.78,207.8 1284.98,219 1330.54,219 v2(1359.54,190)
  Bottom Layer w8: R36.2@508.62,862.65 514.97,869 589,869 606.5,851.5 v2(686,851.5) ; v2(611,518) 620.43,527.43 655.31,527.43 664.14,518.6 744.4,518.6 762.77,500.23 785.77,500.23 823,463 823,342 v2(800,319) ; R40.1@1358.54,143.5 1358.54,189 v2(1359.54,190)
GH_A: U1.1 U8.8 | length 964.6
  Top Layer w8: U8.8@1133.15,831.81 1209.68,831.81 1301.4,923.54 1301.4,1078.4 1318,1095 1318,1614.65 1309.32,1623.33 1288.3,1623.33 1274.74,1609.77 U1.1@1274.74,1601.85
GH_B: U2.1 U8.17 | length 759
  Top Layer w8: U2.1@973.74,1598.85 973.74,1606.77 987.3,1620.33 1008.32,1620.33 1018.52,1610.13 1018.52,1144.48 1050.8,1112.2 1050.8,992.8 1028.81,970.81 U8.17@1028.81,936.15
GH_C: U3.1 U8.18 | length 949.2
  Top Layer w8: U3.1@670.74,1599.85 670.74,1607.77 684.3,1621.33 705.32,1621.33 715.52,1611.13 715.52,1142.7 774.02,1084.2 927.8,1084.2 1009.13,1002.87 U8.18@1009.13,936.15
GL_A: U1.22 U8.10 | length 647.5
  Top Layer w8: U8.10@1133.15,871.19 1205.49,871.19 1270,935.7 1270,1128 1274.74,1132.74 U1.22@1274.74,1408.89 ; U1.22@1274.74,1416.81 U1.22@1274.74,1408.89 ; U1.22@1275.32,1408.31 U1.22@1274.74,1408.89
GL_B: U2.22 U8.15 | length 575.6
  Top Layer w8: U2.22@973.74,1413.81 U2.22@973.74,1405.89 ; U2.22@974.32,1405.31 U2.22@973.74,1405.89 ; v2(1029,1051) 1029,1097 973.74,1152.26 U2.22@973.74,1405.89 ; U8.15@1068.18,936.15 1068.18,956.18 1093,981 v2(1093,1051)
  Bottom Layer w8: v2(1029,1051) v2(1093,1051)
GL_C: U3.22 U8.20 | length 668
  Top Layer w8: U3.22@670.74,1414.81 670.74,1165.7 778.04,1058.4 889.77,1058.4 969.76,978.41 U8.20@969.76,936.15
GND: C5.2 C6.2 C9.2 C10.1 C13.2 C14.2 C15.2 C17.2 C23.2 C24.2 C26.2 C27.2 C28.2 C29.2 C30.2 C31.2 C32.2 C33.2 C34.2 C35.2 C36.2 C37.2 C38.2 C39.2 C40.2 C43.2 C44.2 C45.2 C46.2 C47.2 C48.2 D1.1 D4.1 D5.2 J1.3 J2.2 J3.4 J4.2 R13.2 R15.2 R18.2 R20.1 R31.1 R46.1 S1.1 U8.2 U8.27 U8.35 U8.43 U8.46 U8.49 U9.18 U9.26 U9.40 U9.41 U10.2 | length 5775.6
  Top Layer w8: v2@156.38,733.38 v2@157,734 ; C28.2@190.01,368 190.01,340.01 201.54,328.48 269.48,328.48 316.63,375.63 U9.18@372.54,375.63 429.63,375.63 v1(469,415) 540.02,486.02 540.17,485.87 U9.40@565.46,485.87 ; 452.5,153 459,153 466,160 466,184.76 476.87,195.63 ; v1(469,355.94) 476.87,348.07 U9.26@476.87,318.54 476.87,195.63 ; C32.2@508,164.5 476.87,195.63 ; v2(687.62,319.62) C37.2@687.62,342 ; v2@773.82,525.82 v2@774.04,525.6 ; 827.7,713.7 U8.35@865.43,713.7 910.7,713.7 v1(972.57,775.57) U8.49@999.29,802.29 ; U8.27@865.43,871.19 930.39,871.19 v1(972.57,829) U8.49@999.29,802.29 ; U8.27@867.4,871.34 U8.49@972.57,871.34 ; U8.43@1009.13,668.43 1009.13,792.44 U8.49@999.29,802.29 ; v1(1026,775.57) U8.49@1068,733.57 ; U8.46@1068.18,668.43 1068,668.61 U8.49@1068,733.57 ; v1(1070.15,775.57) 1068,773.42 U8.49@1068,739 ; U8.2@1133.15,713.7 1093.3,713.7 U8.49@1068,739 ; U8.49@1068,733.57 U8.49@1068,739
  Top Layer w10: C26.2@345,191 383,153 452.5,153
  Top Layer w12: v2(419,681) 429.35,670.65 C44.2@429.35,646.62 ; v2(521,677) 521,648.28 C45.2@522,647.28 ; C43.2@567.35,646.62 573,652.28 v2(573,677)
  Top Layer w15: v2@156.38,733.38 v2@156.38,733.62 ; v2(706.86,702.6) 706.86,702.14 742,667 C13.2@743.5,667 790.21,713.7 827.7,713.7
  Top Layer w20: J2.2@72,896.91 89.91,879 v2(155,879) C36.2@155,847.38 ; v2(127,539) 155.38,539 156.38,538 ; C38.2@156.38,515 156.38,538 ; C39.2@156.38,562 156.38,538 ; C40.2@156.38,703.81 v2@156.38,733.38 ; v2(290,179) 325,179 C26.2@345,199 328,216 v2(290,216) ; C34.2@688.62,406 706.5,423.87 C30.2@706.5,460.57 789.43,460.57 v2(797,453) ; C24.2@739.19,875 v2(739.19,907) ; C48.2@751.37,525.82 v2@773.82,525.82 ; v2@774.04,525.6 C47.2@798.81,525.6 ; S1.1@832.95,98 836,101.05 v2(836,153) ; C46.2@891.81,525.6 891.81,495.19 v2(905,482) ; v2(923,239) 956.62,239 R20.1@957,239.38 ; J1.3@1126.5,67.5 J1.3@1125,69 1149.62,93.62 R46.1@1149.62,152 ; v2@1185.98,92.45 v2(1186.09,92.56) D4.1@1229.98,92.56 ; C9.2@1345.5,804 1345.5,741.5 C10.1@1360,727 C10.1@1354,721 ; v2(1350.17,479) C6.2@1350.17,548.09 ; C6.2@1353.09,551 C6.2@1360,557.91
  Top Layer w30: D5.2@1218,262.26 D5.2@1218.26,262 ; C9.2@1345.5,804 v2(1345.5,837)
  Top Layer w40: C5.2@1050,260.91 v2(1129.91,260.91) 1216.65,260.91 D5.2@1218,262.26
  GND w15: v2(1345,1736) 1345,1661 1384.42,1621.58 1384.42,890.93
  Bottom Layer w8: 314,1253 375,1253 399.2,1228.8 399.2,1111.8 428.8,1082.2 841.8,1082.2 919,1005 1274,1005 1295,984 1295,942 1283,930 1264.62,930 R18.2@1244.62,950 ; C23.2@579.16,646.62 C23.2@579.31,646.78
  Bottom Layer w12: v2(573,677) 576,674 C23.2@576,646.62
  Bottom Layer w15: v2@706.33,703.14 v2(706.86,702.6) ; U10.2@1338,1624.29 1338,1663.29 1349.62,1674.92 C35.2@1349.62,1702
  Bottom Layer w20: v2(178,301) C27.2@178,357 ; C33.2@497,647.62 532.16,647.62 R31.1@533.16,646.62 C23.2@576,646.62 ; C29.2@499,135 C29.2@505,141 ; C29.2@499,141 C29.2@505,141 ; v2(556,166) 530,166 C29.2@505,141 ; C31.2@751.43,457 755.43,453 v2(797,453) ; v2(1345,1736) 1345,1706.62 C35.2@1349.62,1702
  other v1: 409.94,415 528.06,415 469,474.06 972.57,731.42 1026,731.42 928.42,775.57 928.42,829 1026,829 1070.15,829 972.57,873.15 1026,873.15 65,1132 105,1132 145,1132 185,1132 225,1132 65,1172 105,1172 145,1172 185,1172 225,1172 65,1212 105,1212 145,1212 65,1252 105,1252 145,1252 65,1292 105,1292 145,1292 65,1332 105,1332 145,1332 65,1372 105,1372 145,1372 65,1412 105,1412 65,1452 105,1452 65,1813 105,1813 145,1813 65,1853 105,1853 145,1853 65,1893 105,1893 145,1893 65,1933 105,1933 145,1933
  other v2: 775,527 156,734
HA: C40.1 R52.1 U9.15 | length 429.6
  Top Layer w8: C40.1@203.62,703.81 204.43,703 v2(233,703) ; v2(267,508) 267,473.4 317.53,422.87 U9.15@372.54,422.87
  Bottom Layer w8: R52.1@203.62,703.81 204.43,703 v2(233,703) 233,608 267,574 v2(267,508)
HB: C39.1 R51.1 U9.14 | length 293.5
  Top Layer w8: C39.1@203.62,562 206.62,565 213.22,558.4 v2(240.6,558.4) 257.56,558.4 273.76,542.2 ; 273.8,542.2 289,527 289,475.74 326.11,438.62 U9.14@372.54,438.62
  Bottom Layer w8: R51.1@203.62,562 206.62,565 213.22,558.4 v2(240.6,558.4)
HC: C38.1 R50.1 U9.16 | length 280.4
  Top Layer w8: v2(237,515) C38.1@203.62,515 311.5,407.13 U9.16@372.54,407.13
  Bottom Layer w8: R50.1@203.62,515 v2(237,515)
IA_IDC: C43.1 R55.2 U9.2 U9.3 | length 192.1
  Top Layer w8: U9.3@508.37,511.46 508.37,532.37 516,540 ; U9.2@524.12,511.46 524.12,531.88 516,540 ; R55.2@614,600.38 613,599.38 C43.1@567.35,599.38 567.35,595.35 566.08,595.35 516,545.26 516,540
IB: C45.1 R54.2 U9.5 | length 134.6
  Top Layer w8: U9.5@476.87,511.46 476.87,597.85 R54.2@475.35,599.38 C45.1@521.35,599.38
IC: C44.1 R53.2 U9.6 | length 146.1
  Top Layer w8: R53.2@384.35,599.38 C44.1@429.35,599.38 461.13,567.6 U9.6@461.13,511.46
INH_A: U8.37 U9.12 | length 706.7
  Top Layer w8: v2(331,489) 336.26,489 355.15,470.12 U9.12@372.54,470.12 ; v2(738,619) 775.02,619 792,635.98 874.18,635.98 891.02,652.82 U8.37@891.02,668.43
  Bottom Layer w8: v2(331,489) 331,490 363.4,522.4 560.05,522.4 672.65,635 722,635 v2(738,619)
INH_B: R29.1 U9.20 | length 679
  Top Layer w8: v2(345.5,336) 353.63,344.13 U9.20@372.54,344.13 ; v2(762,405) 765,408 793,408 840.6,455.6 840.6,521.39 R29.1@841.81,522.6 ; R29.1@841.81,536.6 R29.1@841.81,522.6 ; R29.1@844.81,525.6 R29.1@841.81,522.6
  Bottom Layer w8: v2(345.5,336) 362.2,319.3 527.52,319.3 618.45,410.23 756.77,410.23 v2(762,405)
INH_C: U8.41 U9.28 | length 773.3
  Top Layer w8: U9.28@508.37,318.54 508.37,297.38 544.75,261 706.31,261 807.11,361.8 845.58,361.8 962,478.22 962,595.87 969.76,603.63 U8.41@969.76,668.43
INL_A: R27.1 U9.13 | length 455.6
  Top Layer w8: v2(334,461) 340.63,454.37 U9.13@372.54,454.37 ; v2(673,540) 673,536.35 683.97,525.38 R27.1@705,525.38
  Bottom Layer w8: v2(334,461) 380,507 566.51,507 602.34,542.83 670.17,542.83 v2(673,540)
INL_B: R32.1 U9.21 | length 751.3
  Top Layer w8: v2(363,295) 363,304.54 377,318.54 U9.21@398.13,318.54 ; v2(733,340) 758.04,340 795.24,377.2 839.2,377.2 938.79,476.79 R32.1@938.79,525.35
  Bottom Layer w8: v2(363,295) 371.9,303.9 533.9,303.9 571.4,341.4 731.6,341.4 v2(733,340)
INL_C: U8.42 U9.34 | length 619.4
  Top Layer w8: U9.34@565.46,391.38 608.76,391.38 634.13,366 762.26,366 788.86,392.6 807.6,392.6 v2(862,447) ; U8.42@989.44,668.43 989.44,637.56 v2(995,632)
  Bottom Layer w8: v2(862,447) 862,496.74 995,629.74 v2(995,632)
LED: R41.1 U9.29 | length 895.7
  Top Layer w8: U9.29@524.12,318.54 524.12,303.41 550.93,276.6 691.6,276.6 v2(708,293) ; v2(739,262) 802.22,262 871.82,192.4 1292.6,192.4 v2(1295,190)
  Bottom Layer w8: v2(708,293) v2(739,262) ; v2(1295,190) 1295,148.22 1293.54,146.76 R41.1@1297.3,143
MU: U1.3 U1.4 U1.5 U1.6 U1.7 U1.8 U1.9 U1.10 U1.11
  other v1: 998,1729 1038,1729 1078,1729 1118,1729 1158,1729 1198,1729 998,1769 1038,1769 1078,1769 1118,1769 1158,1769 1198,1769 998,1809 1038,1809 1078,1809 1118,1809 1158,1809 1198,1809 998,1849 1038,1849 1078,1849 1118,1849 1158,1849 1198,1849 998,1889 1038,1889 1078,1889 1118,1889 1158,1889 1198,1889 998,1929 1038,1929 1078,1929 1118,1929 1158,1929 1198,1929
MV: U2.3 U2.4 U2.5 U2.6 U2.7 U2.8 U2.9 U2.10 U2.11
  other v1: 736,1727 776,1727 816,1727 856,1727 896,1727 936,1727 736,1767 776,1767 816,1767 856,1767 896,1767 936,1767 736,1807 776,1807 816,1807 856,1807 896,1807 936,1807 736,1847 776,1847 816,1847 856,1847 896,1847 936,1847 736,1887 776,1887 816,1887 856,1887 896,1887 936,1887 736,1927 776,1927 816,1927 856,1927 896,1927 936,1927
MW: U3.3 U3.4 U3.5 U3.6 U3.7 U3.8 U3.9 U3.10 U3.11
  other v1: 452,1727 492,1727 532,1727 572,1727 612,1727 652,1727 452,1767 492,1767 532,1767 572,1767 612,1767 652,1767 452,1807 492,1807 532,1807 572,1807 612,1807 652,1807 452,1847 492,1847 532,1847 572,1847 612,1847 652,1847 452,1887 492,1887 532,1887 572,1887 612,1887 652,1887 452,1927 492,1927 532,1927 572,1927 612,1927 652,1927
NetC3_1: C3.1 U8.44 | length 79
  Top Layer w8: C3.1@1015.38,595 1028.81,608.44 U8.44@1028.81,668.43
NetC3_2: C3.2 D5.1 L1.1 U8.45 | length 372.6
  Top Layer w8: U8.45@1048.5,668.43 1048.5,608.44 C3.2@1061.94,595
  Top Layer w20: C3.2@1061.94,595 1082.31,574.63 1082.31,463.69 1125.6,420.4 1217.34,420.4 D5.1@1218,419.74
NetC9_1: C9.1 C10.2 C11.1 D6.1 U8.6 | length 212
  Top Layer w8: U8.6@1133.15,792.44 1148.35,792.44 ; 1150.2,792.44 1161.11,792.44 1174.06,779.5 C11.1@1212,779.5 ; C10.2@1280,727 C10.2@1282.5,729.5
  Top Layer w20: C9.1@1282.5,804 1282.5,836.5 1340.69,894.69 D6.1@1352,894.69
NetC11_2: C11.2 U8.5 | length 104.1
  Top Layer w8: U8.5@1133.15,772.76 1159.02,772.76 1212,719.78 C11.2@1212,716.5
NetC12_1: C12.1 U8.3 | length 143.2
  Top Layer w8: U8.3@1133.15,733.39 1152.61,733.39 1159.2,726.8 1159.2,675.8 1186,649 C12.1@1211.5,649
NetC12_2: C12.2 U8.4 | length 212
  Top Layer w8: U8.4@1133.15,753.07 1156.93,753.07 1175,735 1175,688 1183.9,679.1 1244.4,679.1 C12.2@1274.5,649
NetC24_1: C24.1 R56.2 U8.26 | length 127.1
  Top Layer w8: v2@827,875 v2(828,876) 828,879 839.87,890.87 U8.26@865.43,890.87
  Top Layer w20: C24.1@788.62,875 v2@827,875
  Bottom Layer w8: v2@827,875 v2(828,876)
  Bottom Layer w20: R56.2@786.43,875 v2@827,875
NetC26_1: C26.1 U9.25 | length 128.5
  Top Layer w8: C26.1@425,205 461.13,241.13 U9.25@461.13,318.54
NetC27_1: C27.1 C28.1 C29.1 C30.1 C31.1 C32.1 R37.2 U9.17 U9.27 U9.37 | length 671.4
  Top Layer w8: C28.1@253,368 276.38,391.38 U9.17@372.54,391.38 ; U9.27@492.62,318.54 492.62,284.38 507,270 C32.1@507,230.5 ; U9.37@565.46,438.62 621.55,438.62 C30.1@643.5,460.57
  Top Layer w15: v2(235.55,410) 235.55,385.45 C28.1@253,368 ; C30.1@643.5,460.57 664.93,482 v2(664.93,497)
  Top Layer w20: C32.1@508,227.5 536.5,227.5 v2(549.62,214.37) 550.99,213 R37.2@608.5,213
  Bottom Layer w15: v2(235.55,410) 235.55,379.45 C27.1@258,357 ; v2(664.93,497) 664.93,467.36 663,465.43 C31.1@671.43,457
  Bottom Layer w20: C29.1@499,221 505.63,214.37 v2(549.62,214.37)
NetC46_1: C46.1 R30.2 R32.2 U8.40 | length 183.4
  Top Layer w8: C46.1@891.81,572.84 935.42,572.84 R32.2@938.79,576.21 ; R32.2@938.79,572.59 R32.2@938.79,576.21 ; U8.40@950.07,668.43 950.07,637.07 938.79,625.79 R32.2@938.79,576.21
  Bottom Layer w8: v2(939,604) 939,633.38 R30.2@942.62,637
NetC47_1: C47.1 R28.2 R29.2 U8.39 | length 239.2
  Top Layer w8: C47.1@798.81,572.84 R29.2@844.81,572.84 844.81,593.03 v2@847.98,596.2 ; v2(845,599.18) 845.81,599.99 887.99,599.99 930.39,642.39 U8.39@930.39,668.43
  Bottom Layer w8: v2(845,599.18) R28.2@845,638.38
NetC48_1: C48.1 R25.2 R27.2 U8.38 | length 337
  Top Layer w8: R27.2@705,572.62 R27.2@705,575.62 ; v2@710,606 v2(705,606) R27.2@705,575.62 ; U8.38@910.7,668.43 910.7,648.7 882.58,620.58 798.89,620.58 C48.1@751.37,573.06 748.81,575.62 R27.2@705,575.62
  Bottom Layer w8: v2(705,606) 709.38,601.62 R25.2@709.38,567
NetD2_1: D2.1 R40.2 | length 101.1
  Top Layer w8: v2@1357.54,41 1357.54,90.5 D2.1@1360.54,93.5
  Bottom Layer w8: v2@1358.54,42 1358.54,39 v2(1357.54,38) 1357.54,79.5 R40.2@1358.54,80.5
NetD3_1: D3.1 R41.2 | length 96.9
  Top Layer w8: D3.1@1296.3,93.01 1298.54,90.77 v2@1298.54,41
  Bottom Layer w8: R41.2@1298.3,81.01 R41.2@1297.3,80.01 1297.3,39.24 v2(1298.54,38)
NetD4_2: D4.2 R38.1 | length 85.1
  Top Layer w15: v2(1189.08,155.55) D4.2@1229.98,155.55
  Bottom Layer w15: v2(1189.08,155.55) 1197.08,147.55 R38.1@1229.98,147.55
NetJ1_2: J1.2 R45.2 | length 95
  Top Layer w8: R45.2@998.38,153 998.38,95.62 J1.2@1025,69
NetJ3_3: J3.3 R4.2 R44.1 | length 128.5
  Bottom Layer w8: J3.3@284,71 257.62,97.38 R44.1@257.62,131.76 314.13,131.76 R4.2@314.38,132
NetR3_1: R3.1 U8.48 | length 110
  Top Layer w8: U8.48@1107.56,668.43 1107.56,643.94 R3.1@1168,583.5
NetR14_1: R14.1 R20.2 U8.1 | length 623.8
  Top Layer w8: R14.1@956,343.38 v2(956,316) 956,287.62 R20.2@957,286.62 ; U8.1@1133.15,694.02 1133.15,650.15 v2(1134,651)
  Bottom Layer w8: v2(956,316) 883.6,388.4 883.6,490.86 968.74,576 969.26,576 1044.26,651 v2(1134,651)
NetR24_2: R24.2 U8.22 | length 117
  Top Layer w8: R24.2@874.62,1030 930.39,974.23 U8.22@930.39,936.15
NetR26_2: R26.2 U8.13 | length 80.4
  Top Layer w8: U8.13@1107.56,936.15 1107.56,951.56 1137,981 R26.2@1137,1004.38
NetR34_1: R34.1 U8.30 | length 365.3
  Top Layer w8: R34.1@508.62,815.65 513.62,820.65 v2(572,820.65) ; v2(728,811) 729.13,812.13 U8.30@865.43,812.13
  Bottom Layer w8: v2(572,820.65) 583.95,808.7 725.7,808.7 v2(728,811)
NetR35_1: R35.1 U8.31 | length 379.6
  Top Layer w8: R35.1@508.62,768.65 538.62,798.65 v2(554,798.65) ; v2(746,789) 749.44,792.44 U8.31@865.43,792.44
  Bottom Layer w8: v2(554,798.65) 563.05,789.6 v2@746,789.6 ; v2(746,789) v2@751.2,789